# EAGLE board Summer Board (EAGLE 9.6.2)
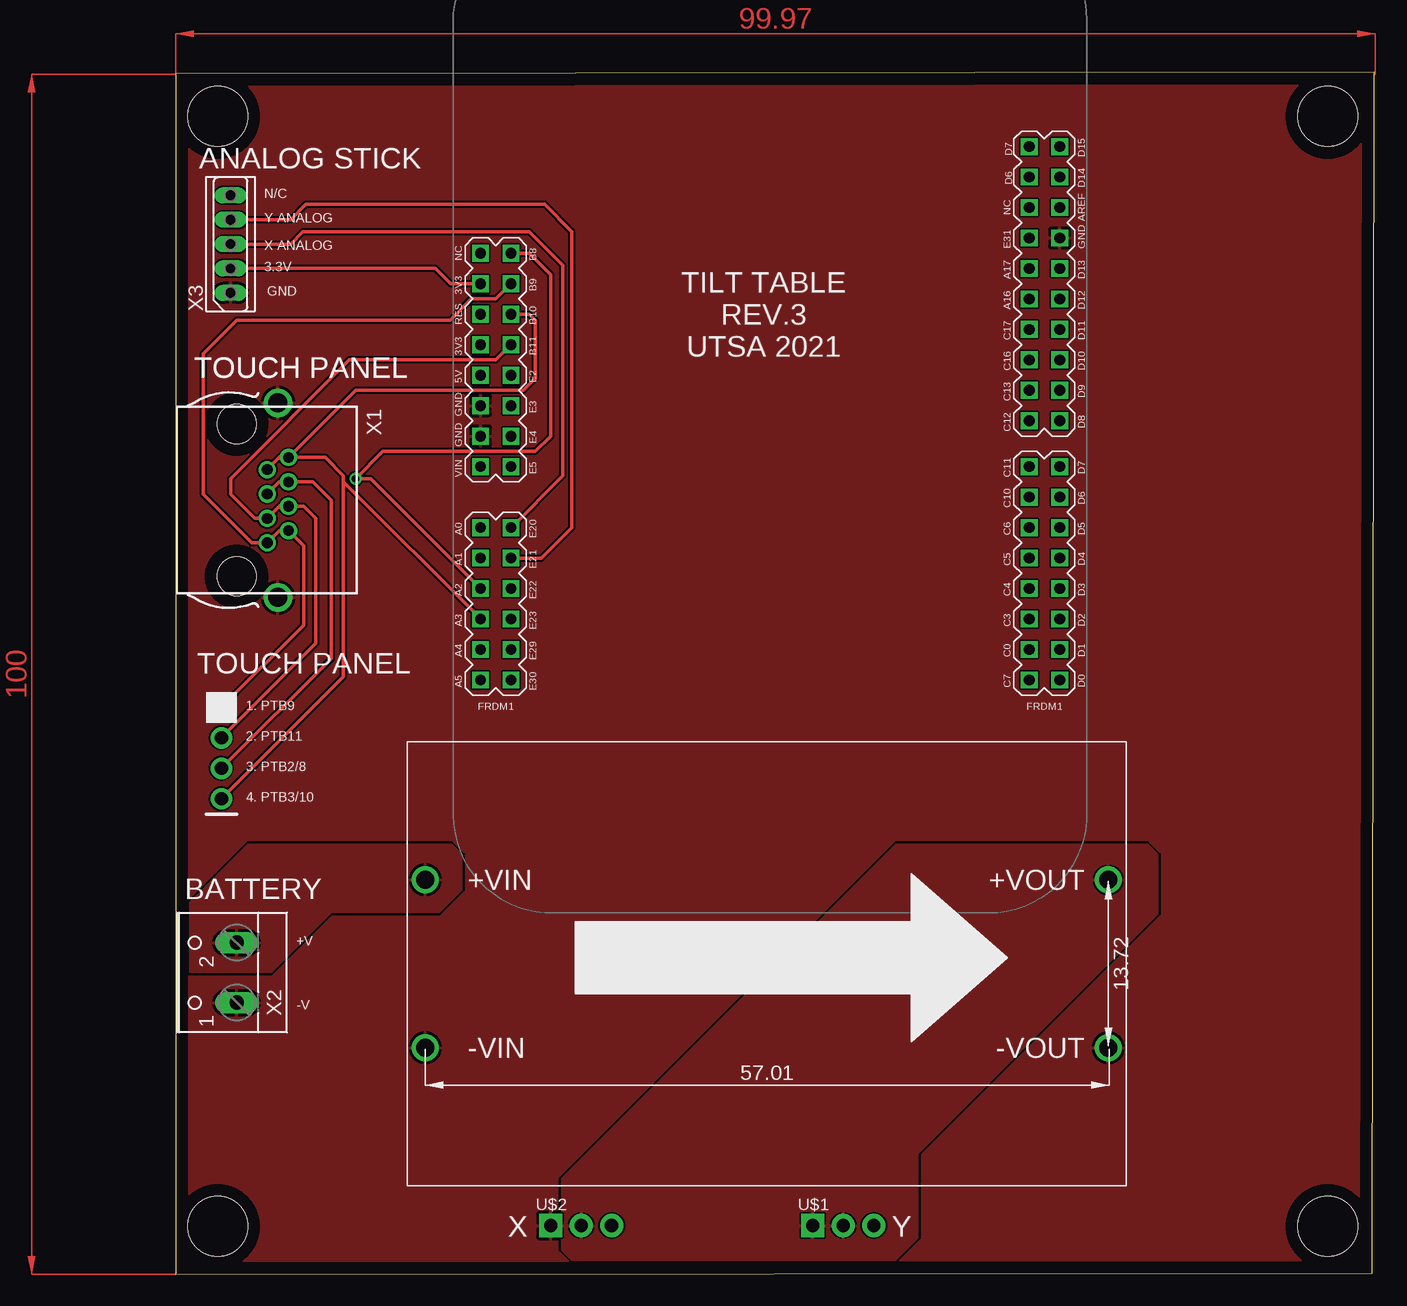
[diagram p0: board, top side]
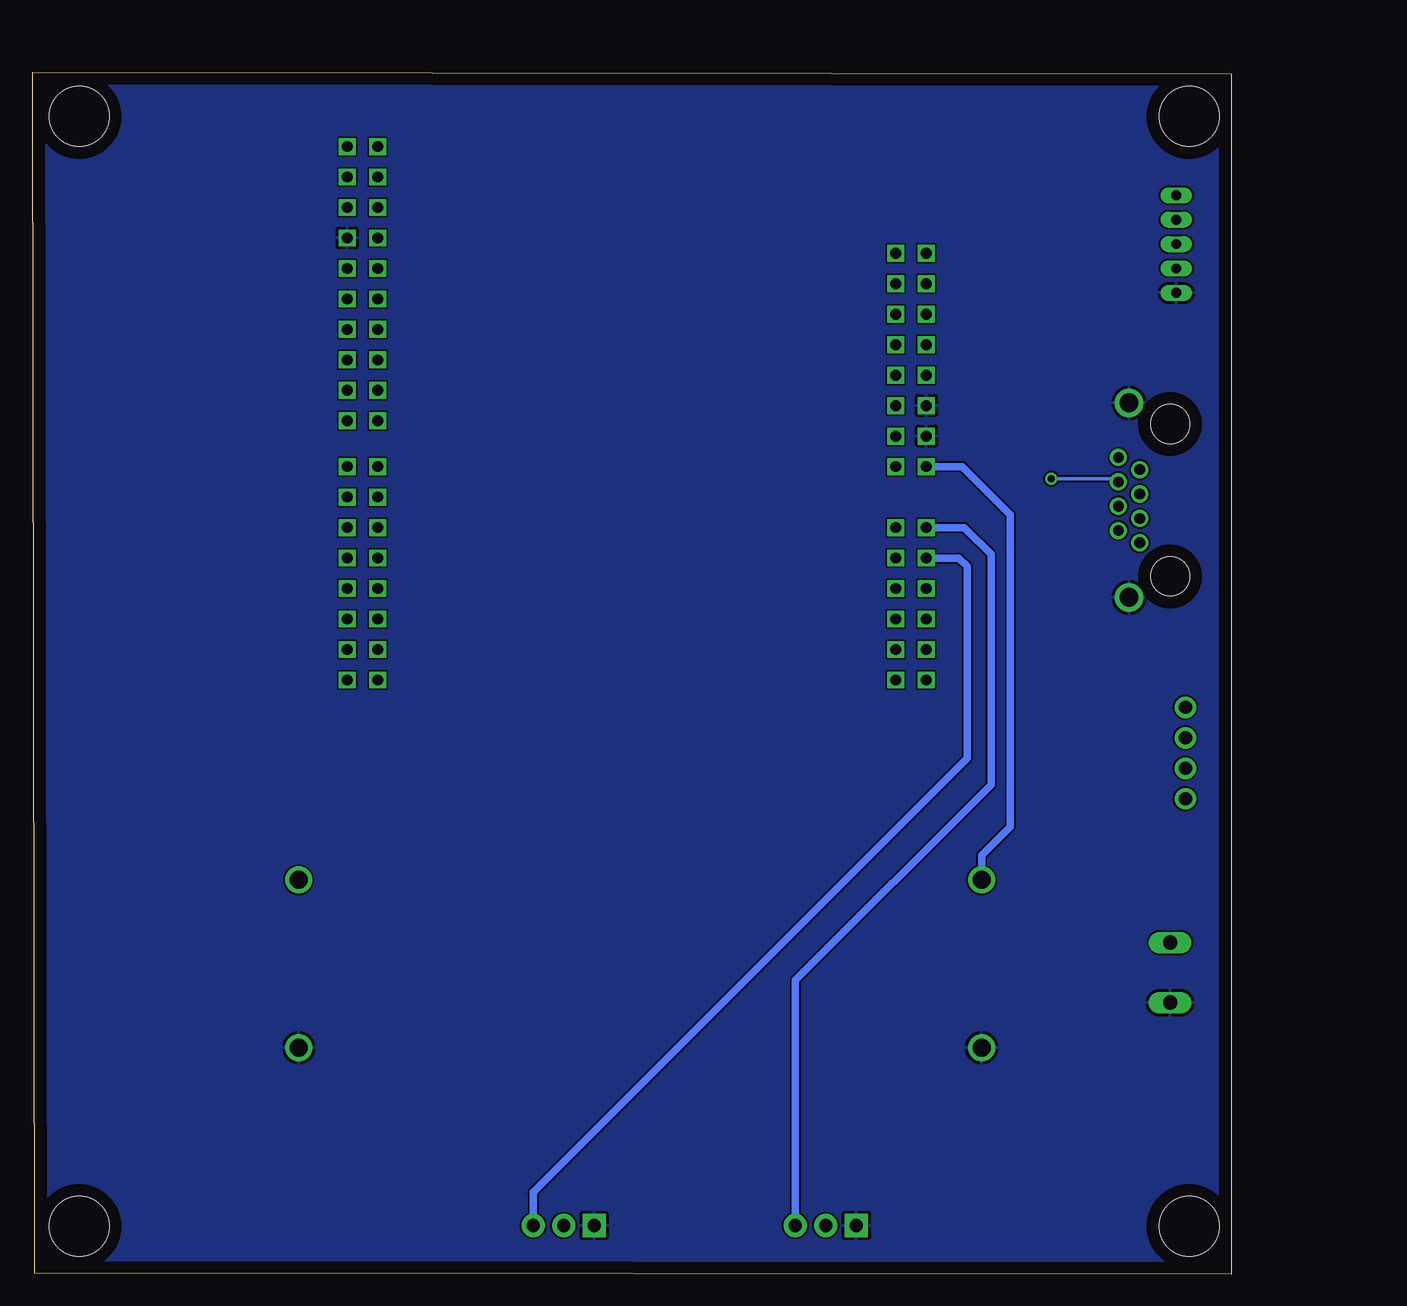
[diagram p1: board, bottom side, seen from below]

Size 99.88 x 100.15 mm. Coordinates in mm from the lower left corner, seen from the top.
Outline: 0,0 99.7,0.1 99.88,100.15 0,100.05 0,0
Copper layers (1*16): Top 0.035mm / dielectric 1.5mm / Bottom 0.035mm
Design rules "default": minimum track width 6mil, minimum drill 0.35mm, track to track 6mil, track to pad 6mil, pad to pad 6mil, via to via 6mil, smd to smd 6mil, copper to edge 40mil, drill to drill 6mil, minimum pad ring 10mil, minimum via ring 8mil, stop-mask expansion 4mil, vias tented up to drill 0mil, thermal gap 10mil
Holes 5 mm at 3.5,96.5 96,96.5 96,4 3.5,4
tRestrict: 19 lines

## Footprints (pad centres in the part's own frame; a part is rotated, then mirrored left to right if it is on the bottom)
FRDM_KL25Z_NORMAL = drill 0.9 square: 3V3 24.13,-15.24; 5V 24.13,-7.62; A0 24.13,5.08; A1 24.13,7.62; A2 24.13,10.16; A3 24.13,12.7; A4 24.13,15.24; A5 24.13,17.78; AREF -24.13,-21.59; D0 -24.13,17.78; D1 -24.13,15.24; D2 -24.13,12.7; D3 -24.13,10.16; D4 -24.13,7.62; D5 -24.13,5.08; D6 -24.13,2.54; D7 -24.13,0; D8 -24.13,-3.81; D9 -24.13,-6.35; D10 -24.13,-8.89; D11 -24.13,-11.43; D12 -24.13,-13.97; D13 -24.13,-16.51; D14 -24.13,-24.13; D15 -24.13,-26.67; GND0 24.13,-2.54; GND1 24.13,-5.08; GND2 -24.13,-19.05; NC1 24.13,-17.78; NC2 -21.59,-21.59; P3V3 24.13,-10.16; PTA16 -21.59,-13.97; PTA17 -21.59,-16.51; PTB8 21.59,-17.78; PTB9 21.59,-15.24; PTB10 21.59,-12.7; PTB11 21.59,-10.16; PTC0 -21.59,15.24; PTC3 -21.59,12.7; PTC4 -21.59,10.16; PTC5 -21.59,7.62; PTC6 -21.59,5.08; PTC7 -21.59,17.78; PTC10 -21.59,2.54; PTC11 -21.59,0; PTC12 -21.59,-3.81; PTC13 -21.59,-6.35; PTC16 -21.59,-8.89; PTC17 -21.59,-11.43; PTD6 -21.59,-24.13; PTD7 -21.59,-26.67; PTE2 21.59,-7.62; PTE3 21.59,-5.08; PTE4 21.59,-2.54; PTE5 21.59,0; PTE20 21.59,5.08; PTE21 21.59,7.62; PTE22 21.59,10.16; PTE23 21.59,12.7; PTE29 21.59,15.24; PTE30 21.59,17.78; PTE31 -21.59,-19.05; RESET 24.13,-12.7; VIN 24.13,0
PINS_3 = drill 1.1 pad 1.93 square: 1 0,0 | drill 1.1 pad 1.93: 2 2.54,0; 3 5.08,0
PCB_4 = drill 1.1 pad 1.778: P$1 0,0; P$2 0,-2.54; P$3 0,-5.08; P$4 0,-7.62
DCDC_CONVERTER_MH = drill 1.5: +VIN 1.5,25.5; +VOUT 58.412,25.5; -VIN 1.5,11.5; -VOUT 58.412,11.5
0446200002 = drill 0.889 pad 1.422: 1 3.556,2.54; 2 2.54,4.318; 3 1.524,2.54; 4 0.508,4.318; 5 -0.508,2.54; 6 -1.524,4.318; 7 -2.54,2.54; 8 -3.556,4.318 | drill 1.575 pad 2.286: S@1 -8.103,3.429; S@2 8.103,3.429 | hole 3.251: 6.35,0; -6.35,0
W237-102 = drill 1.194 long: 1 -2.5,-1.27; 2 2.5,-1.27
SPB5 = drill 0.813 long: 1 -4.064,0; 2 -2.032,0; 3 0,0; 4 2.032,0; 5 4.064,0

## Placement (x,y rotation side)
FRDM1  [FRDM_KL25Z_NORMAL]  49.53,67.31 180 top
U$1  PINS_3_2.54  [PINS_3]  53.09,4.06 0 top
U$2  PINS_3_2.54  [PINS_3]  31.24,4.06 0 top
U$3  PINS_4SILK  [PCB_4]  3.81,47.24 0 top
U$4  MODULE-DCDC  [DCDC_CONVERTER_MH]  19.3,7.37 0 top
X1  0446200002  [0446200002]  5.08,64.52 270 top
X2  [W237-102]  3.81,25.15 90 top
X3  SPB5  [SPB5]  4.57,85.85 90 top

## Library data of the parts
FRDM1 U$1-U$4 = nolan-utsa
X1 = con-molex; MF: MOLEX; MPN: 0446200002; OC_FARNELL: 9251910
X2 = con-wago-500; MPN: 237-102; OC_FARNELL: unknown; OC_NEWARK: 70K9898
X3 = con-hirschmann; OC_FARNELL: unknown; OC_NEWARK: unknown

## Nets
3.3V: FRDM1.3V3 X3.2
5-9V: FRDM1.VIN U$4.+VIN X2.2
BLU: FRDM1.PTB11 U$3.P$2 X1.3 X1.4
BRN: FRDM1.A3 FRDM1.PTB10 U$3.P$4 X1.7 X1.8
GND: FRDM1.GND0 FRDM1.GND1 FRDM1.GND2 U$1.1 U$2.1 U$4.-VIN U$4.-VOUT X1.S@1 X1.S@2 X2.1 X3.1
GRN: FRDM1.A2 FRDM1.PTB8 U$3.P$3 X1.5 X1.6
N$2: U$1.2 U$2.2 U$4.+VOUT
ORG: FRDM1.PTB9 U$3.P$1 X1.1 X1.2
PTB0: FRDM1.A0 U$2.3
PTB1: FRDM1.A1 U$1.3
X_ANA: FRDM1.PTE20 X3.3
Y_ANA: FRDM1.PTE21 X3.4

## Tracks (layer width: path | path; a pad name or v marks a point on that pad's centre or on a via)
3.3V
  Top 0.305: X3.2 21.63,83.82 22.9,82.55 FRDM1.3V3
5-9V
  Bottom 0.61: U$4.+VIN 20.8,34.91 18.4,37.31 18.4,63.31 22.4,67.31 FRDM1.VIN
  pour Top: 1,31 6,36 23,36 24,35 24,32 22,30 13,30 8,25 1,25
BLU
  Top 0.305: U$3.P$2 11.68,52.58 11.68,62.99 10.67,64.01 X1.4 8.64,64.01 X1.3 6.6,62.99 4.57,65.02 4.57,66.29 14.48,76.2 26.67,76.2 FRDM1.PTB11
BRN
  Top 0.305: X1.7 8.64,68.07 X1.8 | U$3.P$4 13.97,49.78 13.97,66.04 | X1.8 12.45,68.07 13.97,66.55 13.97,66.04 | 13.97,66.04 FRDM1.A3 | X1.8 14.99,73.66 28.96,73.66 29.97,74.68 29.97,79.49 29.45,80.01 FRDM1.PTB10
GND
  pour Bottom: 0,100 100,100 100,0 0,0
  pour Top: 0,100 100,100 100,0 0,0
GRN  (via drill 0.6)
  Top 0.305: X1.5 8.64,66.04 X1.6 11.43,66.04 12.95,64.52 12.95,51.31 U$3.P$3 | FRDM1.A2 16.26,66.29 v14.99,66.29 17.27,68.58 29.97,68.58 31.24,69.85 31.24,83.31 29.46,85.09 FRDM1.PTB8 28.45,85.09
  Bottom 0.305: v14.99,66.29 9.65,66.29 X1.6
N$2
  pour Top: 32,8 60,36 81,36 82,35 82,30 62,10 62,3 60,1 33,1 32,2
ORG
  Top 0.305: U$3.P$1 10.67,54.1 10.67,60.71 X1.2 8.64,61.98 X1.1 6.35,60.96 2.29,65.02 2.29,76.71 5.08,79.5 22.86,79.5 24.64,81.28 26.67,81.28 FRDM1.PTB9
PTB0
  Bottom 0.61: U$2.3 36.32,24.5 20,40.82 20,60 22.23,62.23 FRDM1.A0
PTB1
  Bottom 0.61: FRDM1.A1 22.69,59.69 22,59 22,43 58.17,6.83 U$1.3
X_ANA
  Top 0.305: X3.3 9.57,85.85 10.59,86.87 29.46,86.87 32.26,84.07 32.26,66.55 FRDM1.PTE20
Y_ANA
  Top 0.305: X3.4 9.57,87.88 10.84,89.15 30.73,89.15 33.02,86.87 33.02,62.23 30.48,59.69 FRDM1.PTE21
(copper drawn outside any net)
  shapes: Top area x2

## Text on the board
tNames: ANALOG STICK | N/C | Y ANALOG | X ANALOG | 3.3V | GND | TILT TABLE / REV.3 / UTSA 2021 | TOUCH PANEL | TOUCH PANEL | TOUCH PANEL | 1. PTB9 | 2. PTB11 | 3. PTB2/8 | 4. PTB3/10 | BATTERY | +V | -V | X | Y